# Altium PCB PCB1.PcbDoc
Units mil, origin at the board's own origin, x right, y up, seen from the top; angles counter-clockwise.
Board outline 2580 x 1855 mil, 2 copper layers (Top Layer, Bottom Layer); 49 components, 41 nets, 230 pads, 25 vias.
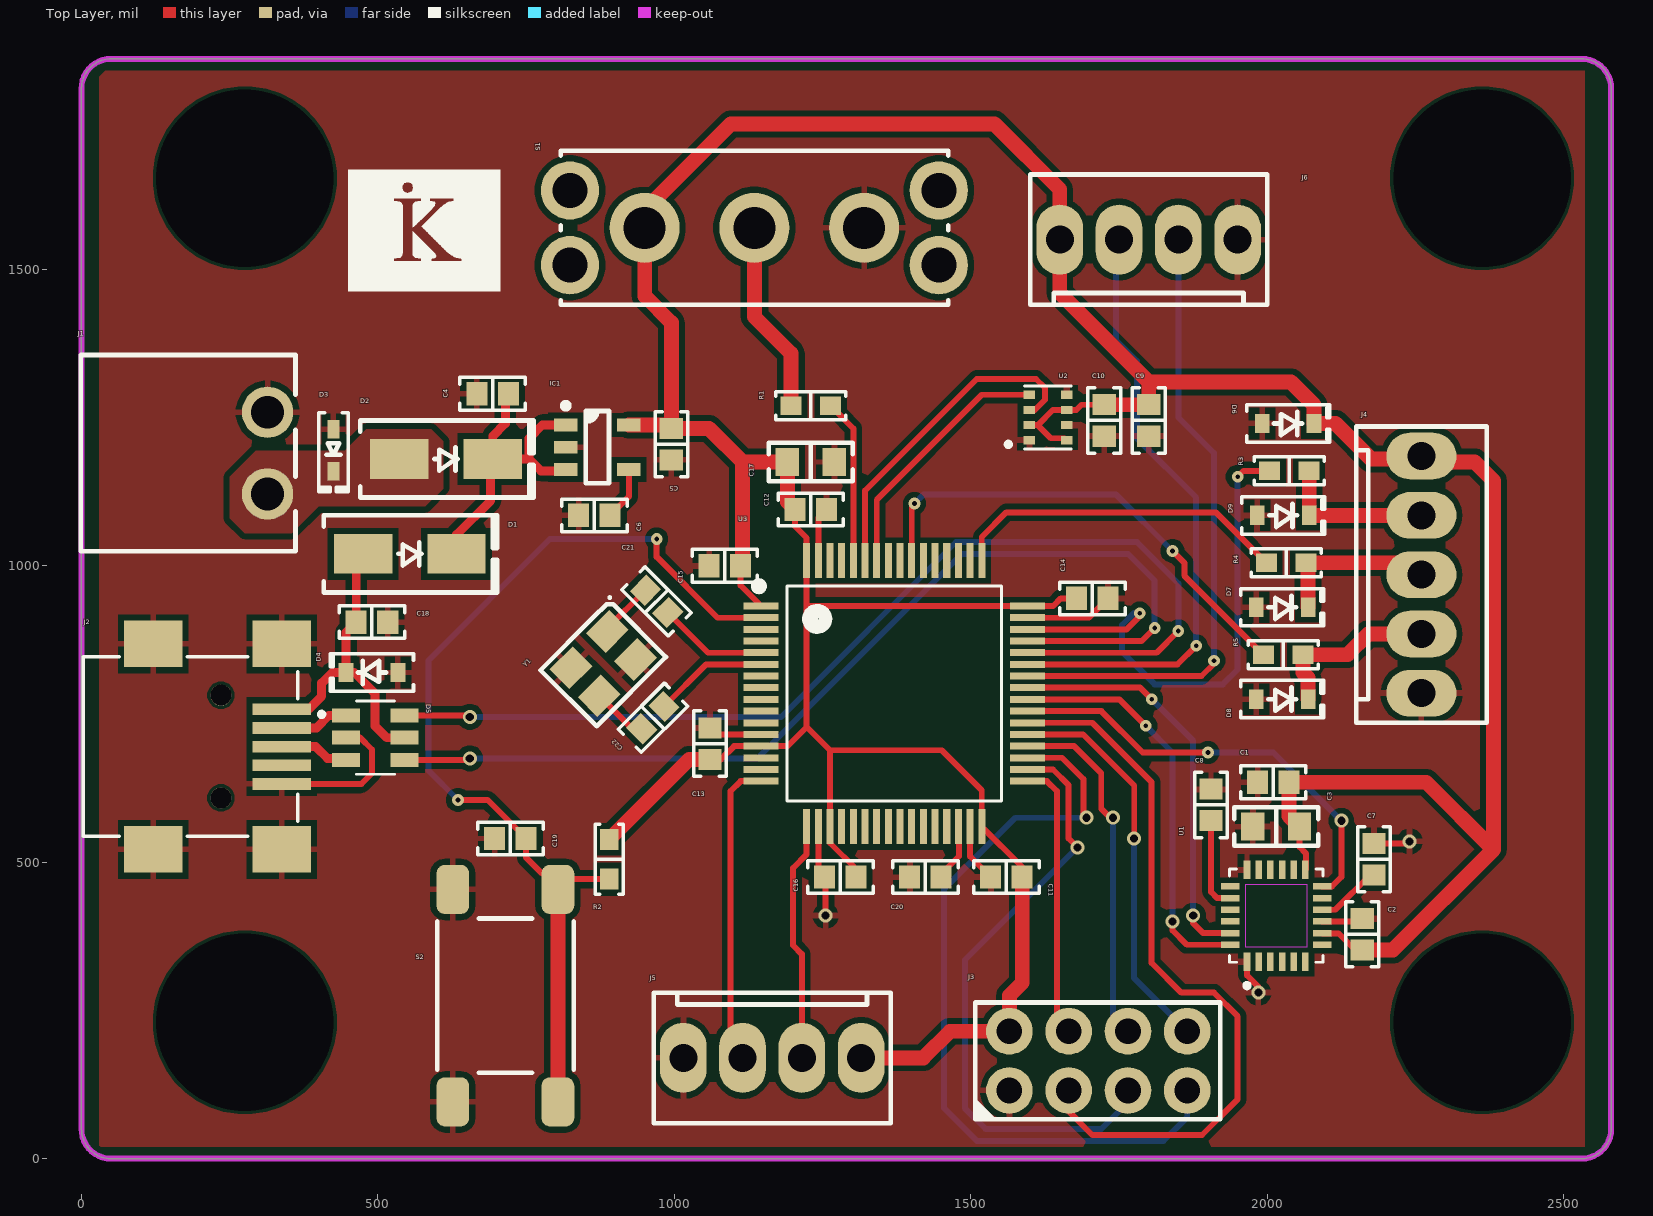
[diagram p0: Top Layer view]
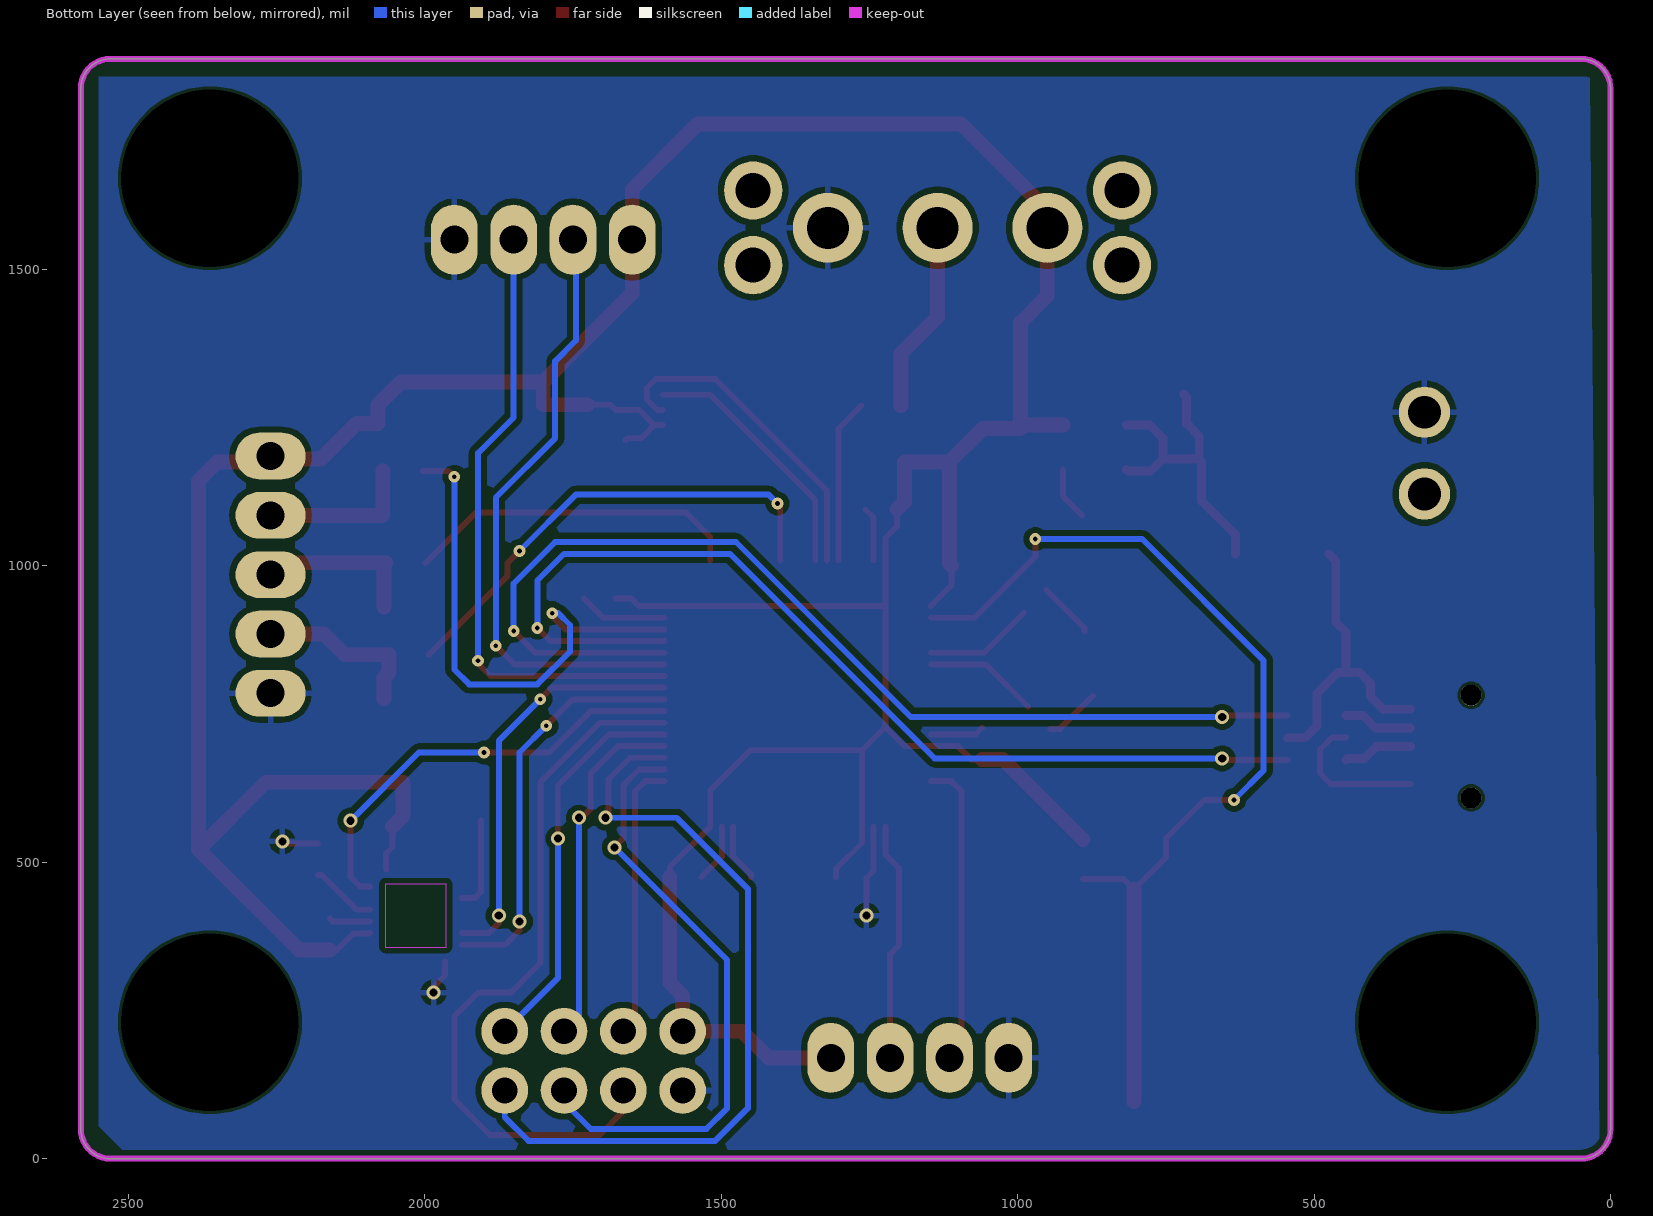
[diagram p1: Bottom Layer view, seen from below]
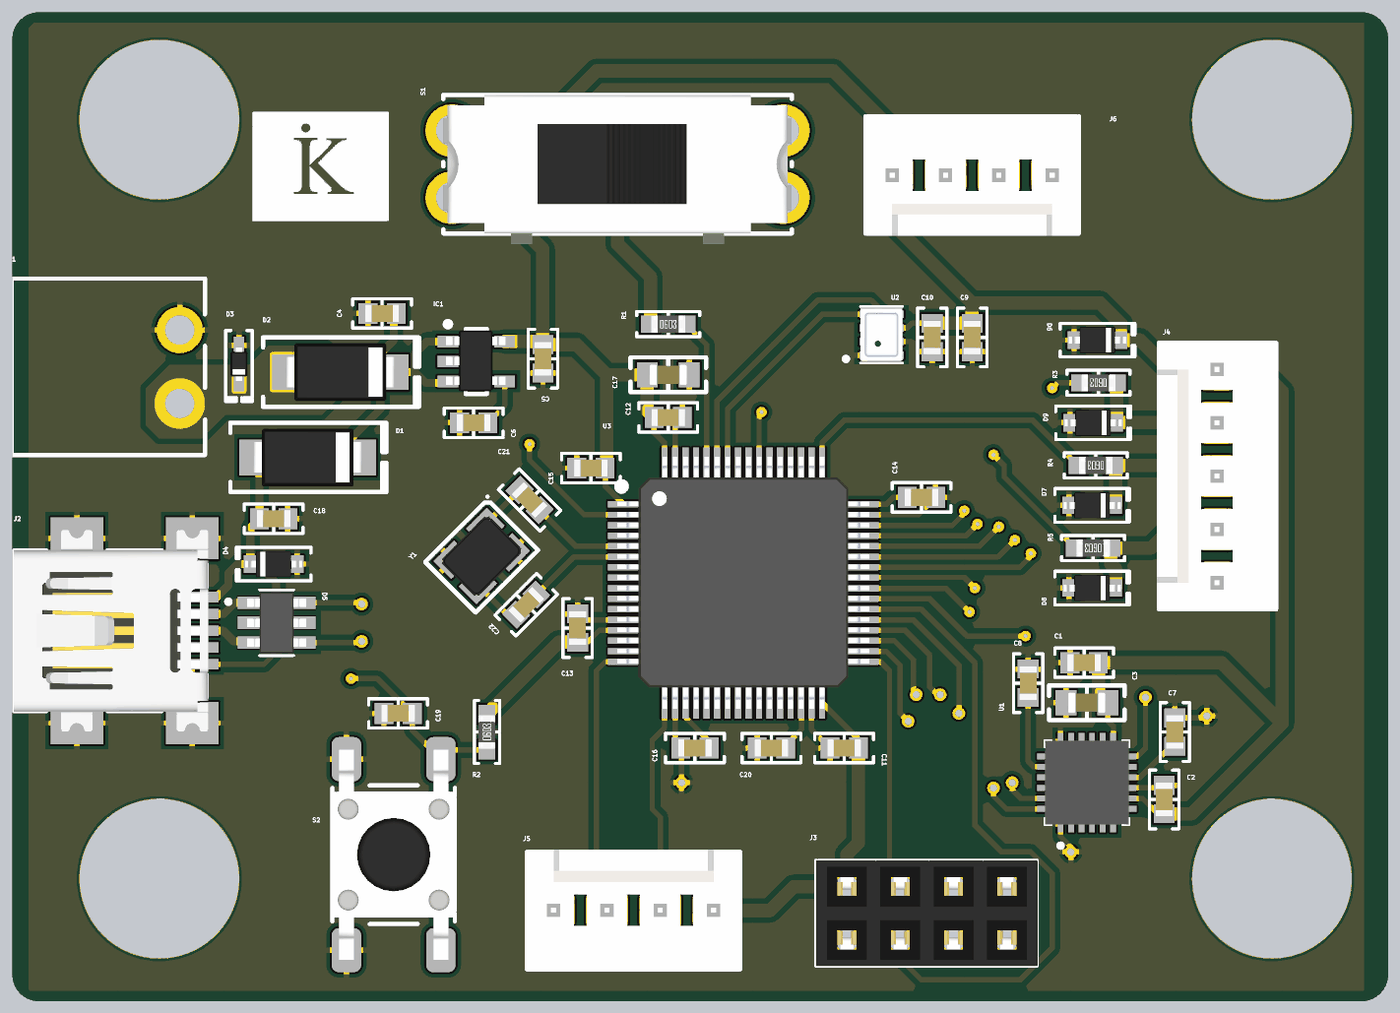
[diagram p2: 3D render of the assembled board from above, using the file's embedded part models]

## Layer stack, top to bottom
Top Solder: solder mask 0.4, Solder Resist, Dk 3.5
Top Layer: signal copper 1.4
Dielectric 1: dielectric 12.6, FR-4, Dk 4.8
Bottom Layer: signal copper 1.4
Bottom Solder: solder mask 0.4, Solder Resist, Dk 3.5

## Board outline
50,0 cw(c50,50) 0,50 0,1805 cw(c50,1805) 50,1855 2530,1855 cw(c2530,1805) 2580,1805 2580,50 cw(c2530,50) 2530,0

## Design rules (kind name [scope] priority, off if disabled: settings)
Clearance [All] p1: gap=10 ignorepadtopadclearanceinfootprint=FALSE except(0: Arc-Text Track-Text SMDPad-Text THPad-Text Via-Text Fill-Text Poly-Text Region-Text Text-Text Text-Hole; 2: Arc-SMDPad Track-SMDPad SMDPad-SMDPad; 5: Arc-Arc Arc-Track Arc-Via Arc-Hole Track-Track Track-Via Track-Hole SMDPad-Via SMDPad-Hole THPad-Via THPad-Hole Via-Hole Fill-Hole Poly-Hole Region-Hole)
HoleSize [All] p1: absolutevalues=TRUE maxlimit=500 minlimit=1 maxpercent=80.000 minpercent=20.000
MinimumSolderMaskSliver [All] p1: minsoldermaskwidth=0.1
PolygonConnect [All] p1: connectstyle=Relief reliefconductorwidth=10 reliefentries=4 polygonreliefangle="90 Angle" airgapwidth=10
RoutingVias [All] p1: holewidth=7.87 width=19.68 viastyle="Through Hole" minholewidth=7.87 minwidth=19.68 maxholewidth=28 maxwidth=50
SilkToSilkClearance [All] p1: silktosilkclearance=2
SilkToSolderMaskClearance [IsPad] p1: minsilkscreentomaskgap=1 clearancetoexposedcopper=TRUE
SolderMaskExpansion [All] p1: expansion=4 istentingtop=FALSE
SupplyNets "Schematic Supply Nets_3" [InNet('VCC_BAT')] p1: voltage=0.000
SupplyNets "Schematic Supply Nets_2" [InNet('GND')] p2: voltage=0.000
SupplyNets "Schematic Supply Nets_1" [InNet('VCC_USB')] p3: voltage=0.000
SupplyNets "Schematic Supply Nets" [InNet('+3V3')] p4: voltage=0.000
Width [All] p1: maxlimit=50 minlimit=10 preferedwidth=10 minimp=50.000000 maximp=50.000000 favimp=50.000000
26 further rules are at their usual default settings.

## Components (designator, comment, footprint, x,y, rotation, side; value= is the part's Value field where it differs from the comment)
C1 "0.1µF" "CAP 0603_1608" 2010,635 r0 top
C2 "0.1µF" "CAP 0603_1608" 2160,378.43 r270 top
C3 "10 µF" "MURATA GRM188 0603_1608" 2015,560 r0 top
C4 "1 µF" "CAP 0603_1608" 693.43,1290 r0 top
C5 "2.2 µF" "CAP 0603_1608" 995,1205 r90 top
C6 "10000 pF" "CAP 0603_1608" 865,1085 r0 top
C7 "0.1µF" "CAP 0603_1608" 2180,505 r270 top
C8 "2200 pF" "CAP 0603_1608" 1905,596.57 r270 top
C9 "0.1µF" "CAP 0603_1608" 1800,1245 r90 top
C10 "0.1µF" "CAP 0603_1608" 1725,1245 r90 top
C11 "0.1µF" "CAP 0603_1608" 1560,475 r0 top
C12 "0.1µF" "CAP 0603_1608" 1230,1095 r180 top
C13 "0.1µF" "CAP 0603_1608" 1060,700 r270 top
C14 "0.1µF" "CAP 0603_1608" 1705,945 r180 top
C15 "0.1µF" "CAP 0603_1608" 1085,1000 r0 top
C16 "0.1µF" "CAP 0603_1608" 1280,475 r0 top
C17 "10 µF" "MURATA GRM188 0603_1608" 1230,1175 r180 top
C18 "0.1µF" "CAP 0603_1608" 490,905 r0 top
C19 "0.1µF" "CAP 0603_1608" 723.43,540 r0 top
C20 "2.2 µF" "CAP 0603_1608" 1423.43,475 r180 top
C21 "20 pF" "CAP 0603_1608" 970,940 r315 top
C22 "20 pF" "CAP 0603_1608" 963.79,743.79 r45 top
D1 "MBRA210ET3G" "DO214AC SMA" 553.74,1020 r0 top
D2 "MBRA210ET3G" "DO214AC SMA" 615,1180 r0 top
D3 "ESD5V0D5B-TP" SOD523F 425,1195 r270 top
D4 "DESD5V0U1BA-7" SOD323 490,820 r180 top
D5 "USBLC6-2SC6" SOT23-6L 495.59,710 r0 top
D6 "DESD5V0U1BA-7" SOD323 2035,1240 r0 top
D7 "DESD5V0U1BA-7" SOD323 2025,930 r0 top
D8 "DESD5V0U1BA-7" SOD323 2025,775 r0 top
D9 "DESD5V0U1BA-7" SOD323 2026.81,1085 r0 top
IC1 "LP2985IM5X-3.3/NOPB" "TI SOT-23-5 DBV" 870,1200 r0 top
J1 "691322110002" "WURTH 691322110002" 180,1190 r90 top
J2 "Mini USB 2.0 Type B" 65100516121 185,695 r270 top
J3 "M20-7830442" "HARWIN M20-7830445" 1715,165 r90 top
J4 "0022272051" "MOLEX KK 0022272051" 2260,985 r270 top
J5 "0022272041" "MOLEX KK 0022272041" 1165,170 r180 top
J6 "0022272041" "MOLEX KK 0022272041" 1800,1550 r0 top
R1 "10 kOhms" "YAGEO RES 0603_1608" 1230,1270 r0 top
R2 "4.7 kOhms" "YAGEO RES 0603_1608" 890,505 r90 top
R3 "22 Ohms" "YAGEO RES 0603_1608" 2036.81,1160 r180 top
R4 "22 Ohms" "YAGEO RES 0603_1608" 2031.81,1005 r180 top
R5 "22 Ohms" "YAGEO RES 0603_1608" 2026.81,850 r180 top
S1 "MS12ASG13" "NKK MS12ASG13" 1134.96,1570 r180 top
S2 "1-1977223-9" "TE FSM6JSMA" 715,275 r0 top
U1 "MPU6050" MPU6050 2015,410 r90 top
U2 "BMP280" BMP280 1630,1250 r180 top
U3 "STM32F411RET6" LQFP-64 1370.98,785.2 r0 top
Y1 "16MHz" "ABRACON ABM8G" 880,835 r225 top

## Footprints (in the part's own frame and the unit in brackets; to place one, negate y for a bottom-side part, rotate by r counter-clockwise, add the part's x,y. Pads: shape width x height; smd on the part's side, far side on the other; paste and mask are expansions set on the pad)
65100516121 [mm] "Mini USB 2.0 Type B SMT Horizontal 5 Contacts"
  rect 0.5x2.5 smd: 1(-1.6,3.875) 2(-0.8,3.875) 3(0,3.875) 4(0.8,3.875) 5(1.6,3.875)
  round 0.9 hole 0.9 unplated: M1(-2.2,1.275) M2(2.2,1.275)
  rect 2x2.5 smd: S1(-4.4,3.875) S2(4.4,3.875) S3(-4.4,-1.625) S4(4.4,-1.625)
  silkscreen extent -3.85,-4.62 3.85,4.58, body extent -4.8,-4.63 4.8,4.62, height 3.92
"ABRACON ABM8G" [mm] "Crystal, 4-Leads, Body 2.50x3.20mm, Pitch 2.20mm, IPC Medium Density"
  rect 1.4x1.2 smd: 1(-1.1,-0.85) 2(1.1,-0.85) 3(1.1,0.85) 4(-1.1,0.85)
  silkscreen extent -2.25,-1.85 2.1,1.7, body extent -1.61,-1.26 1.61,1.26, height 0.6
BMP280 [mm]
  rect 0.5x0.35 smd: 1(0.8,0.975) 2(0.8,0.325) 3(0.8,-0.325) 4(0.8,-0.975) 5(-0.8,-0.975) 6(-0.8,-0.325) 7(-0.8,0.325) 8(-0.8,0.975)
  silkscreen extent -1,-1.35 1.79,1.35, body extent -1,-1.25 1,1.25, height 1
"CAP 0603_1608" [mm] "Chip Capacitor, 2-Leads, Body 1.60x0.80mm, IPC Medium Density"
  rect 0.9x1 smd: 1(-0.675,0) 2(0.675,0)
  silkscreen extent -1.4,-0.7 1.4,0.7, body extent -0.8,-0.41 0.8,0.41, height 0.82
"DO214AC SMA" [mm] "Molded Diode, 2-Leads, Body 4.30x2.60mm, IPC Medium Density"
  rect 2.5x1.7 smd: 1(-2,0) 2(2,0)
  silkscreen extent -3.68,-1.65 3.75,1.65, body extent -2.6,-1.37 2.6,1.37, height 2.4
"HARWIN M20-7830445" [mm] "2.54mm DIL PC TAIL PIN HEADER ASSEMBLY"
  round 2 hole 1.1: 1(-1.27,3.81) 2(-1.27,1.27) 3(-1.27,-1.27) 4(-1.27,-3.81) 5(1.27,-3.81) 6(1.27,-1.27) 7(1.27,1.27) 8(1.27,3.81)
  silkscreen extent -2.5,-5.23 2.5,5.27, body extent -2.52,-5.28 2.52,5.28, height 8.5
LQFP-64 [mm]
  rect 1.5x0.3 smd: 1(-5.705,3.73) 2(-5.705,3.23) 3(-5.705,2.73) 4(-5.705,2.23) 5(-5.705,1.73) 6(-5.705,1.23) 7(-5.705,0.73) 8(-5.705,0.23) 9(-5.705,-0.27) 10(-5.705,-0.77) 11(-5.705,-1.27) 12(-5.705,-1.77) 13(-5.705,-2.27) 14(-5.705,-2.77) 15(-5.705,-3.27) 16(-5.705,-3.77) 33(5.695,-3.77) 34(5.695,-3.27) 35(5.695,-2.77) 36(5.695,-2.27) 37(5.695,-1.77) 38(5.695,-1.27) 39(5.695,-0.77) 40(5.695,-0.27) 41(5.695,0.23) 42(5.695,0.73) 43(5.695,1.23) 44(5.695,1.73) 45(5.695,2.23) 46(5.695,2.73) 47(5.695,3.23) 48(5.695,3.73)
  rect 0.3x1.5 smd: 17(-3.755,-5.72) 18(-3.255,-5.72) 19(-2.755,-5.72) 20(-2.255,-5.72) 21(-1.755,-5.72) 22(-1.255,-5.72) 23(-0.755,-5.72) 24(-0.255,-5.72) 25(0.245,-5.72) 26(0.745,-5.72) 27(1.245,-5.72) 28(1.745,-5.72) 29(2.245,-5.72) 30(2.745,-5.72) 31(3.245,-5.72) 32(3.745,-5.72) 49(3.745,5.68) 50(3.245,5.68) 51(2.745,5.68) 52(2.245,5.68) 53(1.745,5.68) 54(1.245,5.68) 55(0.745,5.68) 56(0.245,5.68) 57(-0.255,5.68) 58(-0.755,5.68) 59(-1.255,5.68) 60(-1.755,5.68) 61(-2.255,5.68) 62(-2.755,5.68) 63(-3.255,5.68) 64(-3.755,5.68)
  silkscreen extent -6.09,-4.62 4.59,4.86, body extent -6,-6 6,6, height 1.6
"MOLEX KK 0022272041" [mm]
  oval 2x3 hole 1.2: 1(-3.81,0) 2(-1.27,0) 3(1.27,0) 4(3.81,0)
  silkscreen extent -5.08,-2.79 5.08,2.79, body extent -5.08,-2.9 5.08,2.9, height 11.7
"MOLEX KK 0022272051" [mm]
  oval 2x3 hole 1.2: 1(-5.08,0) 2(-2.54,0) 3(0,0) 4(2.54,0) 5(5.08,0)
  silkscreen extent -6.35,-2.79 6.35,2.79, body extent -6.35,-2.9 6.35,2.9, height 11.7
MPU6050 [mm]
  rect 0.79x0.28 smd: 1(-1.97,1.25) 2(-1.97,0.75) 3(-1.97,0.25) 4(-1.97,-0.25) 5(-1.97,-0.75) 6(-1.97,-1.25) 13(1.97,-1.25) 14(1.97,-0.75) 15(1.97,-0.25) 16(1.97,0.25) 17(1.97,0.75) 18(1.97,1.25)
  rect 0.28x0.79 smd: 7(-1.25,-1.97) 8(-0.75,-1.97) 9(-0.25,-1.97) 10(0.25,-1.97) 11(0.75,-1.97) 12(1.25,-1.97) 19(1.25,1.97) 20(0.75,1.97) 21(0.25,1.97) 22(-0.25,1.97) 23(-0.75,1.97) 24(-1.25,1.97)
  Keep-Out Layer region: 1.35,-1.3 -1.35,-1.3 -1.35,1.3 1.35,1.3
  silkscreen extent -3.1,-2 2,2, body extent -2,-2 2,2, height 0.93
"MURATA GRM188 0603_1608" [mm] "Chip Capacitor, 2-Leads, Body 1.60x0.80mm"
  rect 1x1.2 smd: 1(-1,0) 2(1,0)
  silkscreen extent -1.8,-0.83 1.8,0.83, body extent -0.9,-0.5 0.9,0.5, height 1
"NKK MS12ASG13" [mm]
  round 3 hole 1.8: 1(-4.7,0) 2(0,0) 3(4.7,0)
  round 2.5 hole 1.5: M(-7.9,-1.6) M(-7.9,1.6) M(7.9,-1.6) M(7.9,1.6)
  silkscreen extent -8.3,-3.3 8.3,3.3, body extent -8.31,-3.3 8.31,3.81, height 13.41
SOD323 [mm] "SOD, 2-Leads, Body 1.25x2.50mm, IPC Medium Density"
  rect 0.625x0.83 smd: 1(-1.112,0) 2(1.112,0)
  silkscreen extent -1.78,-0.8 1.78,0.8, body extent -1.36,-0.62 1.36,0.62, height 1.05
SOD523F [mm] "SODFL, 2-Leads, Body 0.80x1.60mm, IPC Medium Density"
  rect 0.8x0.5 smd: 1(-0.9,0) 2(0.9,0)
  silkscreen extent -1.6,-0.64 1.8,0.64, body extent -0.8,-0.4 0.8,0.4, height 0.65
SOT23-6L [mm]
  rect 1.2x0.6 smd mask+0.05: 1(-1.255,0.95) 2(-1.255,0) 3(-1.255,-0.95) 4(1.255,-0.95) 5(1.255,0) 6(1.255,0.95)
  silkscreen extent -2.4,-1.57 0.81,1.57, body extent -1.4,-1.46 1.4,1.46, height 1.42
"TE FSM6JSMA" [mm]
  rrect50% 1.4x2.1 smd: 1(2.25,4.55) 2(2.25,-4.55) 3(-2.25,4.55) 4(-2.25,-4.55)
  silkscreen extent -2.92,-3.3 2.92,3.3, body extent -3,-5 3,5, height 7.11
"TI SOT-23-5 DBV" [mm] "SOT23, 5-Leads, Body 2.90x2.80mm, Pitch 0.95mm, IPC Medium Density"
  rect 1x0.55 smd: 1(-1.35,0.95) 2(-1.35,0) 3(-1.35,-0.95) 4(1.35,-0.95) 5(1.35,0.95)
  silkscreen extent -1.47,-1.55 0.5,1.9, body extent -1.44,-1.43 1.39,1.48, height 1.5
"WURTH 691322110002" [mm] "2 Position Terminal Block Header, Male Pins, 3.5mm Pitch,8.4x9.2mm Body, 90°, Right Angle, THT"
  round 2.2 hole 1.4: 1(-1.75,-3.4) 2(1.75,-3.4)
  silkscreen extent -4.2,-4.6 4.2,4.6, body extent -4.2,-4.6 4.2,4.6, height 7.2
"YAGEO RES 0603_1608" [mm] "Chip Resistor, 2-Leads, Body 1.60x0.80mm"
  rect 0.9x0.8 smd: 1(-0.85,0) 2(0.85,0)
  silkscreen extent -1.5,-0.6 1.5,0.6, body extent -0.8,-0.4 0.8,0.4, height 0.45

## Part data
C1 C2 C7 C9 C10 C11 C12 C13 C14 C15 C16 C18 C19: library part LD03ZC104KAB2A, "CAP CER 0.1UF 10V X7R 0603", Device Package="0603 (1608 Metric)", manufacturer="AVX Corporation", Operating Temperature="-55°C ~ 125°C", Supplier Part Number 1=478-12926-1-ND, Temperature Coefficient=X7R, Tolerance=±10%, Voltage - Rated=10V, Applications="General Purpose", Capacitance=0.1µF, componentlink1description=Datasheet, componentlink1url=http://datasheets.avx.com/LD-Series.pdf, componentlink2description="DigiKey Link", componentlink2url=http://digikey.com/product-detail/en/avx-corporation/LD03ZC104KAB2A/478-12926-1-ND/9949296, lastupdated="2.09.2020 01:03:06", Lifecycle Status=Active, Minimum Order=1, Mounting Type="Surface Mount, MLCC", Package / Case="0603 (1608 Metric)", packaging=TapeAndReel, Part Number=LD03ZC104KAB2A, Part Status=Active, partid=16481, price=0.17, series=LD, Size / Dimension="0.063\" L x 0.032\" W (1.60mm x 0.81mm)", Supplier 1=DigiKey, Thickness (Max)="0.035\" (0.90mm)"
C3 C17: library part GRM188C81A106MA73D, "CAP CER 10UF 10V X6S 0603", Device Package="0603 (1608 Metric)", manufacturer="Murata Electronics", Operating Temperature="-55°C ~ 105°C", Supplier Part Number 1=490-7197-1-ND, Temperature Coefficient=X6S, Tolerance=±20%, Voltage - Rated=10V, Applications="General Purpose", Capacitance="10 µF", componentlink1description=Datasheet, componentlink1url=https://www.murata.com/~/media/webrenewal/support/library/catalog/products/capacitor/mlcc/c02e.ashx?la=en-us, componentlink2description="DigiKey Link", componentlink2url=https://www.digikey.com/en/products/detail/murata-electronics/GRM188C81A106MA73D/3900461, lastupdated="20.07.2024 00:23:22", Lifecycle Status=Active, Minimum Order=1, Mounting Type="Surface Mount, MLCC", Package / Case="0603 (1608 Metric)", packaging=TapeAndReel, Part Number=GRM188C81A106MA73D, Part Status=Active, partid=2456, price=0.04, series=GRM, Size / Dimension="0.063\" L x 0.031\" W (1.60mm x 0.80mm)", Supplier 1=DigiKey, Thickness (Max)="0.039\" (1.00mm)"
C4: library part CL10B105KA8NNNC, "CAP CER 1UF 25V X7R 0603", Device Package="0603 (1608 Metric)", manufacturer="Samsung Electro-Mechanics", Operating Temperature="-55°C ~ 125°C", Supplier Part Number 1=1276-1184-1-ND, Temperature Coefficient=X7R, Tolerance=±10%, Voltage - Rated=25V, Applications="General Purpose", Capacitance="1 µF", componentlink1description=Datasheet, componentlink1url=http://www.samsungsem.com/kr/support/product-search/mlcc/CL10B105KA8NNNC.jsp, componentlink2description="DigiKey Link", componentlink2url=https://www.digikey.com/en/products/detail/samsung-electro-mechanics/CL10B105KA8NNNC/3886842, lastupdated="9.02.2024 20:10:26", Lifecycle Status=Active, Minimum Order=1, Mounting Type="Surface Mount, MLCC", Package / Case="0603 (1608 Metric)", packaging=TapeAndReel, Part Number=CL10B105KA8NNNC, Part Status=Active, partid=5552, price=0.01, series=CL, Size / Dimension="0.063\" L x 0.031\" W (1.60mm x 0.80mm)", Supplier 1=DigiKey, Thickness (Max)="0.035\" (0.90mm)"
C5: library part CL10A225KO8NNNC, "CAP CER 2.2UF 16V X5R 0603", Device Package="0603 (1608 Metric)", manufacturer="Samsung Electro-Mechanics", Operating Temperature="-55°C ~ 85°C", Supplier Part Number 1=1276-1040-1-ND, Temperature Coefficient=X5R, Tolerance=±10%, Voltage - Rated=16V, Applications="General Purpose", Capacitance="2.2 µF", componentlink1description=Datasheet, componentlink1url=http://www.samsungsem.com/kr/support/product-search/mlcc/CL10A225KO8NNNC.jsp, componentlink2description="DigiKey Link", componentlink2url=https://www.digikey.com/en/products/detail/samsung-electro-mechanics/CL10A225KO8NNNC/3886698, lastupdated="9.02.2024 20:10:26", Lifecycle Status=Active, Minimum Order=1, Mounting Type="Surface Mount, MLCC", Package / Case="0603 (1608 Metric)", packaging=TapeAndReel, Part Number=CL10A225KO8NNNC, Part Status=Active, partid=5651, price=0.01, series=CL, Size / Dimension="0.063\" L x 0.031\" W (1.60mm x 0.80mm)", Supplier 1=DigiKey, Thickness (Max)="0.035\" (0.90mm)"
C6: library part CC0603MRX7R8BB103, "CAP CER 10000PF 25V X7R 0603", Device Package="0603 (1608 Metric)", manufacturer=Yageo, Operating Temperature="-55°C ~ 125°C", Supplier Part Number 1=311-4108-1-ND, Temperature Coefficient=X7R, Tolerance=±20%, Voltage - Rated=25V, Applications="General Purpose", Capacitance="10000 pF", componentlink1description=Datasheet, componentlink1url=https://www.yageo.com/upload/media/product/productsearch/datasheet/mlcc/UPY-GPHC_X7R_6.3V-to-50V_18.pdf, componentlink2description="DigiKey Link", componentlink2url=https://www.digikey.com/en/products/detail/yageo/CC0603MRX7R8BB103/5883820, lastupdated="9.02.2024 20:10:23", Lifecycle Status=Active, Minimum Order=1, Mounting Type="Surface Mount, MLCC", Package / Case="0603 (1608 Metric)", packaging=TapeAndReel, Part Number=CC0603MRX7R8BB103, Part Status=Active, partid=7806, price=0.01, series=CC, Size / Dimension="0.063\" L x 0.031\" W (1.60mm x 0.80mm)", Supplier 1=DigiKey, Thickness (Max)="0.035\" (0.90mm)"
C8: library part 885012006015, "CAP CER 2200PF 10V C0G/NP0 0603", Device Package="0603 (1608 Metric)", manufacturer="Würth Elektronik", Operating Temperature="-55°C ~ 125°C", Supplier Part Number 1=732-12250-1-ND, Temperature Coefficient="C0G, NP0", Tolerance=±5%, Voltage - Rated=10V, Applications="General Purpose", Capacitance="2200 pF", componentlink1description=Datasheet, componentlink1url=https://katalog.we-online.de/pbs/datasheet/885012006015.pdf, componentlink2description="DigiKey Link", componentlink2url=https://www.digikey.com/en/products/detail/würth-elektronik/885012006015/5455584, lastupdated="9.02.2024 20:10:22", Lifecycle Status=Active, Minimum Order=1, Mounting Type="Surface Mount, MLCC", Package / Case="0603 (1608 Metric)", packaging=TapeAndReel, Part Number=885012006015, Part Status=Active, partid=8918, price=0.06, series=WCAP-CSGP, Size / Dimension="0.063\" L x 0.031\" W (1.60mm x 0.80mm)", Supplier 1=DigiKey, Thickness (Max)="0.034\" (0.87mm)"
C20: library part LMK107BJ225KAHT, "CAP CER 2.2UF 10V X5R 0603", Device Package="0603 (1608 Metric)", manufacturer="Taiyo Yuden", Operating Temperature="-55°C ~ 85°C", Ratings=AEC-Q200, Supplier Part Number 1=587-3414-1-ND, Temperature Coefficient=X5R, Tolerance=±10%, Voltage - Rated=10V, Applications=Automotive, Capacitance="2.2 µF", componentlink1description=Datasheet, componentlink1url="https://ds.yuden.co.jp/TYCOMPAS/ut/detail?pn=LMK107BJ225KAHT  &u=M", componentlink2description="DigiKey Link", componentlink2url=https://www.digikey.com/en/products/detail/taiyo-yuden/LMK107BJ225KAHT/4157763, lastupdated="9.02.2024 20:10:23", Lifecycle Status=Active, Minimum Order=1, Mounting Type="Surface Mount, MLCC", Package / Case="0603 (1608 Metric)", packaging=TapeAndReel, Part Number=LMK107BJ225KAHT, Part Status=Active, partid=39173, price=0.01, series=M, Size / Dimension="0.063\" L x 0.031\" W (1.60mm x 0.80mm)", Supplier 1=DigiKey, Thickness (Max)="0.035\" (0.90mm)"
C21 C22: library part C0603C200G8HAC7867, "CAP CER 20PF 10V X8R 0603", Device Package="0603 (1608 Metric)", manufacturer=KEMET, Operating Temperature="-55°C ~ 150°C", Supplier Part Number 1=399-C0603C200G8HAC7867CT-ND, Temperature Coefficient=X8R, Tolerance=±2%, Voltage - Rated=10V, Applications="General Purpose", Capacitance="20 pF", componentlink1description=Datasheet, componentlink1url=https://api.kemet.com/component-edge/download/datasheet/C0603C200G8HAC7867.pdf, componentlink2description="DigiKey Link", componentlink2url=https://www.digikey.com/en/products/detail/kemet/C0603C200G8HAC7867/7946222, Features="Low ESL, High Temperature", lastupdated="9.02.2024 20:09:59", Lifecycle Status=Active, Minimum Order=1, Mounting Type="Surface Mount, MLCC", Package / Case="0603 (1608 Metric)", packaging=TapeAndReel, Part Number=C0603C200G8HAC7867, Part Status=Active, partid=35714, price=0.01, series="SMD Comm X8R HT150C", Size / Dimension="0.063\" L x 0.031\" W (1.60mm x 0.80mm)", Supplier 1=DigiKey, Thickness (Max)="0.034\" (0.87mm)"
D1 D2: "DIODE SCHOTTKY 10V 2A SMA", Current - Average Rectified (Io)=2A, Current - Reverse Leakage @ Vr="50µA @ 10V", manufacturer="ON Semiconductor", Operating Temperature - Junction="-65°C ~ 150°C", Package / Case="DO-214AC, SMA", Supplier Device Package=SMA, Supplier Part Number 1=MBRA210ET3GOSCT-ND, Voltage - DC Reverse (Vr) (Max)=10V, Voltage - Forward (Vf) (Max) @ If="500mV @ 2A", componentlink1description=Datasheet, componentlink1url=http://www.onsemi.com/pub/Collateral/MBRA210ET3-D.PDF, componentlink2description="DigiKey Link", componentlink2url=http://digikey.com/product-detail/en/on-semiconductor/MBRA210ET3G/MBRA210ET3GOSCT-ND/2705027, Diode Type=Schottky, lastupdated="3.06.2024 19:54:30", Lifecycle Status=Active, Minimum Order=1, Mounting Type="Surface Mount", packaging=TapeAndReel, Part Number=MBRA210ET3G, Part Status=Active, partid=2119, price=0.19, series=-, Speed="Fast Recovery =< 500ns, > 200mA (Io)", Supplier 1=DigiKey
D3: "TVS DIODE 5VWM 13VC SOD523", Capacitance @ Frequency="27pF @ 1MHz", Current - Peak Pulse (10/1000µs)=12A, manufacturer="Micro Commercial Co", Operating Temperature="-55°C ~ 150°C (TJ)", Package / Case="SC-79, SOD-523", Power - Peak Pulse=150W, Power Line Protection=No, Supplier Device Package=SOD-523, Supplier Part Number 1=ESD5V0D5B-TPMSCT-ND, Voltage - Breakdown (Min)=5.8V, Voltage - Clamping (Max) @ Ipp=13V, Voltage - Reverse Standoff (Typ)="5V (Max)", Applications="General Purpose", Bidirectional Channels=1, componentlink1description=Datasheet, componentlink1url=https://www.mccsemi.com/pdf/Products/ESD5V0D5B(SOD-523).pdf, componentlink2description="DigiKey Link", componentlink2url=https://www.digikey.com/en/products/detail/micro-commercial-co/ESD5V0D5B-TP/2213550, lastupdated="3.06.2024 20:22:21", Lifecycle Status=Active, Minimum Order=1, Mounting Type="Surface Mount", packaging=TapeAndReel, Part Number=ESD5V0D5B-TP, Part Status=Active, partid=9819, price=0.07, series=-, Supplier 1=DigiKey, Type=Zener
D4 D6 D7 D8 D9: "TVS DIODE 5VWM 7.2VC SOD323", Capacitance @ Frequency="2.9pF @ 1MHz", Current - Peak Pulse (10/1000µs)="3A (8/20µs)", manufacturer="Diodes Incorporated", Operating Temperature="-65°C ~ 150°C (TJ)", Package / Case="SC-76, SOD-323", Power Line Protection=No, Supplier Device Package=SOD-323, Supplier Part Number 1=DESD5V0U1BA-7DICT-ND, Voltage - Breakdown (Min)=5.5V, Voltage - Clamping (Max) @ Ipp="7.2V (Typ)", Voltage - Reverse Standoff (Typ)="5V (Max)", Applications="General Purpose", Bidirectional Channels=1, componentlink1description=Datasheet, componentlink1url=https://www.diodes.com/assets/Datasheets/DESD5V0U1BA.pdf, componentlink2description="DigiKey Link", componentlink2url=https://www.digikey.com/en/products/detail/diodes-incorporated/DESD5V0U1BA-7/5371876, lastupdated="3.06.2024 20:22:28", Lifecycle Status=Active, Minimum Order=1, Mounting Type="Surface Mount", packaging=TapeAndReel, Part Number=DESD5V0U1BA-7, Part Status=Active, partid=9987, price=0.02, series=-, Supplier 1=DigiKey, Type=Zener
D5: "15V Clamp 6A (8/20µs) Ipp Tvs Diode Surface Mount SOT-23-6", Current - Peak Pulse (10/1000µs)="5A (8/20µs)", Operating Temperature="-40°C ~ 150°C (TJ)", Package / Case=SOT23-6, Voltage - Breakdown (Min)=6V, Voltage - Clamping (Max) @ Ipp=17V, Voltage - Reverse Standoff (Typ)=5.25V, componentlink1description=Datasheet, componentlink1url=https://mm.digikey.com/Volume0/opasdata/d220001/medias/docus/5338/USBLC6-2SC6.pdf, componentlink2description="Digikey Link", componentlink2url=https://www.digikey.com/en/products/detail/umw/usblc6-2sc6/16705896, Designed by=İK
IC1: "IC REG LINEAR 3.3V 150MA SOT23-5", Current - Output=150mA, Current - Quiescent (Iq)="95 µA", Current - Supply (Max)="2.5 mA", manufacturer="Texas Instruments", Operating Temperature="-40°C ~ 125°C", Package / Case="SC-74A, SOT-753", Supplier Device Package=SOT-23-5, Supplier Part Number 1=LP2985IM5X-3.3/NOPBCT-ND, Voltage - Output (Min/Fixed)=3.3V, Voltage - Input (Max)=16V, Voltage Dropout (Max)="0.58V @ 150mA", componentlink1description=Datasheet, componentlink1url=http://www.ti.com/general/docs/suppproductinfo.tsp?distId=10&gotoUrl=http%3A%2F%2Fwww.ti.com%2Flit%2Fgpn%2Flp2985-n, componentlink2description="DigiKey Link", componentlink2url=https://www.digikey.com/en/products/detail/texas-instruments/LP2985IM5X-3-3-NOPB/367679, Control Features=Enable, lastupdated="21.06.2022 13:01:53", Lifecycle Status=Active, Minimum Order=1, Mounting Type="Surface Mount", Number of Regulators=1, Output Configuration=Positive, Output Type=Fixed, packaging=TapeAndReel, Part Number=LP2985IM5X-3.3/NOPB, Part Status=Active, price=0.45, Protection Features="Over Current, Over Temperature, Short Circuit", PSRR="45dB (1kHz)", series=-, Supplier 1=DigiKey
J1: "TERM BLOCK HDR 2POS 90DEG 3.5MM", Color=Green, Current - UL="10 A", manufacturer="Würth Elektronik", Operating Temperature="-40°C ~ 105°C", Supplier Part Number 1=732-2769-ND, Voltage - UL="300 V", componentlink1description=Datasheet, componentlink1url=https://katalog.we-online.de/em/datasheet/6913221100xx.pdf, componentlink2description="DigiKey Link", componentlink2url=https://www.digikey.com/en/products/detail/würth-elektronik/691322110002/2508538, Contact Mating Finish=Tin, Header Orientation="90°, Right Angle", lastupdated="21.06.2022 14:48:48", Lifecycle Status=Active, Minimum Order=1, Mounting Type="Through Hole", Number of Levels=1, Number of Positions=2, packaging=Bulk, Part Number=691322110002, Part Status=Active, Pitch="0.138\" (3.50mm)", Positions Per Level=2, price=0.26, series="WR-TBL Series 3221", Supplier 1=DigiKey, Termination Style=Solder, Type="Header, Male Pins, Shrouded (4 Side)"
J2: library part 65100516121, "Mini USB 2.0 Type B Horizontal SMT 5 Contacts WR-COM", Operating Temperature="-40 to 105 degC", Rated Current="1 A", componentlink1description=Manufacturer, componentlink1url=http://www.we-online.de, componentlink2description=Datasheet, componentlink2url=http://katalog.we-online.de/em/datasheet/65100516121.pdf, Gender=Female, Mounting Technology=SMT, Orientation=Horizontal, packaging=Tray, Part Number=65100516121, Published Date="May 2018", Publisher="Wurth Elektronik", Interface Type="Mini USB 2.0 Type B"
J3: "CONN RCPT 8POS 0.1 GOLD PCB", Current Rating (Amps)=3A, manufacturer="Harwin Inc.", Material Flammability Rating="UL94 V-0", Operating Temperature="-40°C ~ 105°C", Supplier Part Number 1=952-1789-ND, Insulation Color=Black, componentlink1description=Datasheet, componentlink1url=https://cdn.harwin.com/pdfs/C001XX_M20_Series_Connectors.pdf, componentlink2description="DigiKey Link", componentlink2url=http://digikey.com/product-detail/en/harwin-inc/M20-7830442/952-1789-ND/3727758, Connector Type=Receptacle, Contact Finish - Mating=Gold, Contact Finish - Post=Tin, Contact Finish Thickness - Mating=Flash, Contact Length - Post="0.118\" (3.00mm)", Contact Type="Female Socket", Fastening Type=Push-Pull, lastupdated="21.09.2022 19:04:26", Lifecycle Status=Active, Mated Stacking Heights="11.04mm, 12.63mm", Minimum Order=1, Mounting Type="Through Hole", Number of Positions=8, Number of Positions Loaded=All, Number of Rows=2, packaging=Tube, Part Number=M20-7830442, Part Status=Active, Pitch - Mating="0.100\" (2.54mm)", price=1.36, Row Spacing - Mating="0.100\" (2.54mm)", series=M20, Style="Board to Board or Cable", Supplier 1=DigiKey, Termination=Solder, Insulation Height="0.335\" (8.51mm)"
J4: "CONN HEADER VERT 5POS 2.54MM", manufacturer=Molex, Material Flammability Rating="UL94 V-0", Supplier Part Number 1=WM4114-ND, Insulation Color=Natural, componentlink1description=Datasheet, componentlink1url=https://www.molex.com/pdm_docs/sd/022272051_sd.pdf, componentlink2description="DigiKey Link", componentlink2url=http://digikey.com/product-detail/en/molex/0022272051/WM4114-ND/1130580, Connector Type=Header, Contact Finish - Mating=Tin, Contact Finish - Post=Tin, Contact Finish Thickness - Mating="100.0µin (2.54µm)", Contact Length - Mating="0.295\" (7.49mm)", Contact Length - Post="0.140\" (3.56mm)", Contact Material=Brass, Contact Shape=Square, Contact Type="Male Pin", Fastening Type="Friction Lock", lastupdated="12.01.2020 23:52:16", Lifecycle Status=Active, Minimum Order=1, Mounting Type="Through Hole", Number of Positions=5, Number of Positions Loaded=All, Number of Rows=1, Overall Contact Length="0.560\" (14.22mm)", packaging=Bulk, Part Number=0022272051, Part Status=Active, partid=79, Pitch - Mating="0.100\" (2.54mm)", price=0.46, series="KK 6410", Shrouding="Shrouded - 1 Wall", Style="Board to Cable/Wire", Supplier 1=DigiKey, Termination=Solder, Insulation Height="0.461\" (11.70mm)", Insulation Material="Polyamide (PA), Nylon"
J5 J6: "CONN HEADER VERT 4POS 2.54MM", manufacturer=Molex, Material Flammability Rating="UL94 V-0", Supplier Part Number 1=WM4113-ND, Insulation Color=Natural, componentlink1description=Datasheet, componentlink1url=https://www.molex.com/pdm_docs/sd/022272041_sd.pdf, componentlink2description="DigiKey Link", componentlink2url=http://digikey.com/product-detail/en/molex/0022272041/WM4113-ND/1130579, Connector Type=Header, Contact Finish - Mating=Tin, Contact Finish - Post=Tin, Contact Finish Thickness - Mating="100.0µin (2.54µm)", Contact Length - Mating="0.295\" (7.49mm)", Contact Length - Post="0.140\" (3.56mm)", Contact Material=Brass, Contact Shape=Square, Contact Type="Male Pin", Fastening Type="Friction Lock", lastupdated="12.01.2020 23:52:05", Lifecycle Status=Active, Minimum Order=1, Mounting Type="Through Hole", Number of Positions=4, Number of Positions Loaded=All, Number of Rows=1, Overall Contact Length="0.560\" (14.22mm)", packaging=Bulk, Part Number=0022272041, Part Status=Active, partid=78, Pitch - Mating="0.100\" (2.54mm)", price=0.40, series="KK 6410", Shrouding="Shrouded - 1 Wall", Style="Board to Cable/Wire", Supplier 1=DigiKey, Termination=Solder, Insulation Height="0.461\" (11.70mm)", Insulation Material="Polyamide (PA), Nylon"
R1: library part AC0603FR-1310KL, "RES 10K OHM 1% 1/10W 0603", Device Package="0603 (1608 Metric)", manufacturer=Yageo, Operating Temperature="-55°C ~ 155°C", Power (Watts)="0.1W, 1/10W", Ratings=AEC-Q200, Supplier Device Package=0603, Supplier Part Number 1=13-AC0603FR-1310KLCT-ND, Temperature Coefficient=±100ppm/°C, Tolerance=±1%, componentlink1description=Datasheet, componentlink1url=https://www.yageo.com/upload/media/product/productsearch/datasheet/rchip/PYu-AC_51_RoHS_L_8.pdf, componentlink2description="DigiKey Link", componentlink2url=https://www.digikey.com/en/products/detail/yageo/AC0603FR-1310KL/13694194, Composition="Thick Film", Features="Automotive AEC-Q200, Moisture Resistant", Height - Seated (Max)="0.022\" (0.55mm)", lastupdated="25.07.2024 09:19:08", Lifecycle Status=Active, Minimum Order=1, Number of Terminations=2, Package / Case="0603 (1608 Metric)", packaging=CutTape, Part Number=AC0603FR-1310KL, Part Status=Active, partid=67630, price=0.01, Resistance="10 kOhms", series=AC, Size / Dimension="0.063\" L x 0.031\" W (1.60mm x 0.80mm)", Supplier 1=DigiKey
R2: library part AC0603FR-134K7L, "RES 4.7K OHM 1% 1/10W 0603", Device Package="0603 (1608 Metric)", manufacturer=Yageo, Operating Temperature="-55°C ~ 155°C", Power (Watts)="0.1W, 1/10W", Ratings=AEC-Q200, Supplier Device Package=0603, Supplier Part Number 1=13-AC0603FR-134K7LCT-ND, Temperature Coefficient=±100ppm/°C, Tolerance=±1%, componentlink1description=Datasheet, componentlink1url=https://www.yageo.com/upload/media/product/productsearch/datasheet/rchip/PYu-AC_51_RoHS_L_8.pdf, componentlink2description="DigiKey Link", componentlink2url=https://www.digikey.com/en/products/detail/yageo/AC0603FR-134K7L/14008318, Composition="Thick Film", Height - Seated (Max)="0.022\" (0.55mm)", lastupdated="25.07.2024 09:19:09", Lifecycle Status=Active, Minimum Order=1, Number of Terminations=2, Package / Case="0603 (1608 Metric)", packaging=CutTape, Part Number=AC0603FR-134K7L, Part Status=Active, partid=66748, price=0.01, Resistance="4.7 kOhms", series=AC, Size / Dimension="0.063\" L x 0.031\" W (1.60mm x 0.80mm)", Supplier 1=DigiKey
R3 R4 R5: library part AC0603FR-0722RL, "RES SMD 22 OHM 1% 1/10W 0603", Device Package="0603 (1608 Metric)", manufacturer=Yageo, Operating Temperature="-55°C ~ 155°C", Power (Watts)="0.1W, 1/10W", Ratings=AEC-Q200, Supplier Device Package=0603, Supplier Part Number 1=YAG3581CT-ND, Temperature Coefficient=±100ppm/°C, Tolerance=±1%, componentlink1description=Datasheet, componentlink1url=https://www.yageo.com/upload/media/product/productsearch/datasheet/rchip/PYu-AC_51_RoHS_L_7.pdf, componentlink2description="DigiKey Link", componentlink2url=https://www.digikey.com/en/products/detail/yageo/AC0603FR-0722RL/5895927, Composition="Thick Film", Features="Automotive AEC-Q200, Moisture Resistant", Height - Seated (Max)="0.022\" (0.55mm)", lastupdated="25.07.2024 09:19:25", Lifecycle Status=Active, Minimum Order=1, Number of Terminations=2, Package / Case="0603 (1608 Metric)", packaging=CutTape, Part Number=AC0603FR-0722RL, Part Status=Active, partid=16487, price=0.01, Resistance="22 Ohms", series=AC, Size / Dimension="0.063\" L x 0.031\" W (1.60mm x 0.80mm)", Supplier 1=DigiKey
S1: "SWITCH SLIDE SPDT 0.4VA 28V", Current Rating (Amps)="0.4VA (AC/DC)", manufacturer="NKK Switches", Operating Temperature="-30°C ~ 85°C", Supplier Part Number 1=360-2388-ND, Voltage Rating - AC="28 V", Actuator Length=5.10mm, Actuator Type=Standard, Circuit=SPDT, componentlink1description=Datasheet, componentlink1url=https://www.nkkswitches.com/pdf/MSnonilluminated.pdf, componentlink2description="DigiKey Link", componentlink2url=https://www.digikey.com/en/products/detail/nkk-switches/MS12ASG13/1052535, Contact Finish=Gold, Contact Material=Copper, Contact Timing="Non-Shorting (BBM)", Features="Epoxy Sealed Terminals", lastupdated="26.09.2022 03:18:31", Lifecycle Status=Active, Minimum Order=1, Mounting Type="Through Hole", packaging=Bulk, Part Number=MS12ASG13, Part Status=Active, partid=6, price=2.95, series=MS, Supplier 1=DigiKey, Switch Function=On-On, Termination Style="PC Pin", Voltage Rating - DC="28 V"
S2: "SWITCH TACTILE SPST-NO 0.05A 24V", Contact Rating @ Voltage="0.05A @ 24VDC", manufacturer="TE Connectivity ALCOSWITCH Switches", Operating Force=260gf, Supplier Part Number 1=1-1977223-9-ND, Actuator Height off PCB, Vertical=7.00mm, Actuator Orientation="Top Actuated", Actuator Type=Standard, Circuit=SPST-NO, componentlink1description=Datasheet, componentlink1url=https://www.te.com/commerce/DocumentDelivery/DDEController?Action=srchrtrv&DocNm=1308111-1_SWITCHES_CORE_PROGRAM_CATALOG&DocType=CS&DocLang=English, componentlink2description="DigiKey Link", componentlink2url=http://digikey.com/product-detail/en/te-connectivity-alcoswitch-switches/1-1977223-9/1-1977223-9-ND/5401299, lastupdated="3.06.2024 20:19:31", Lifecycle Status=Active, Minimum Order=1500, Mounting Type="Surface Mount", Outline="6.00mm x 6.00mm", packaging=Bulk, Part Number=1-1977223-9, price=0.36, series=FSMJSMA, Supplier 1=DigiKey, Switch Function=Off-Mom, Termination Style="Gull Wing", Illumination=Non-Illuminated
U1: "Accelerometer, Gyroscope, 6 Axis Sensor I2C Output", manufacturer="TDK InvenSense", Operating Temperature="-40°C ~ 85°C", Package / Case="24-VFQFN Module Exposed Pad", componentlink1description=Datasheet, componentlink1url=https://invensense.tdk.com/wp-content/uploads/2015/02/MPU-6000-Datasheet1.pdf, Output Type=I2C, Sensor Type="Accelerometer, Gyroscope, 6 Axis"
U2: "Pressure Sensor 4.35PSI ~ 15.95PSI (30kPa ~ 110kPa) Absolute 16b 8-SMD", manufacturer="Bosch Sensortec", Operating Pressure="4.35PSI ~ 15.95PSI (30kPa ~ 110kPa)", Operating Temperature="-40°C ~ 85°C", Package / Case=8-SMD, Voltage - Supply="1.71V ~ 3.6V", Accuracy="±0.015PSI (±0.1kPa)", componentlink1description=Datasheet, componentlink1url=https://www.bosch-sensortec.com/media/boschsensortec/downloads/datasheets/bst-bmp280-ds001.pdf, Features="Standby Mode", Maximum Pressure="290.08PSI (2000kPa)", Mounting Type="Surface Mount", Output=16b, Output Type="I2C, SPI", Port Style="No Port", Pressure Type=Absolute, Termination Style="SMD (SMT) Tab"
U3: "ARM® Cortex®-M4 STM32F4 Microcontroller IC 32-Bit Single-Core 100MHz 512KB (512K x 8) FLASH 64-LQFP (10x10)", manufacturer=ST, Operating Temperature="-40°C ~ 85°C (TA)", Package / Case=64-LQFP, Supplier Device Package="64-LQFP (10x10)", Voltage - Supply (Vcc/Vdd)="1.7V ~ 3.6V", componentlink1description=Datasheet, componentlink1url=https://www.st.com/content/ccc/resource/technical/document/datasheet/b3/a5/46/3b/b4/e5/4c/85/DM00115249.pdf/files/DM00115249.pdf/jcr:content/translations/en.DM00115249.pdf, componentlink2description="Digikey Link", componentlink2url=https://www.digikey.com/en/products/detail/stmicroelectronics/stm32f411ret6/4935722, Connectivity="I2C, IrDA, LINbus, MMC/SD/SDIO, SPI, UART/USART, USB OTG", Core Processor="ARM® Cortex®-M4", Core Size="32-Bit Single-Core", Data Converters="A/D 16x12b", Mounting Type="Surface Mount", Number of I/O=50, Oscillator Type=Internal, Peripherals="Brown-out Detect/Reset, DMA, I2S, POR, PWM, WDT", Program Memory Size="512KB (512K x 8)", Program Memory Type=FLASH, RAM Size="128K x 8", series=STM32F4, Speed=100MHz
Y1: library part ABM8G-16.000MHZ-18-D2Y-T3, "CRYSTAL 16.0000MHZ 18PF SMD", Device Package="4-SMD, No Lead", ESR (Equivalent Series Resistance)="80 Ohms", Frequency Stability=±30ppm, Frequency Tolerance=±20ppm, Load Capacitance=18pF, manufacturer="Abracon LLC", Operating Mode=Fundamental, Operating Temperature="-40°C ~ 85°C", Supplier Part Number 1=535-14314-1-ND, componentlink1description=Datasheet, componentlink1url=https://abracon.com/Resonators/ABM8G.pdf, componentlink2description="DigiKey Link", componentlink2url=http://digikey.com/product-detail/en/abracon-llc/ABM8G-16.000MHZ-18-D2Y-T3/535-14314-1-ND/8538154, Frequency=16MHz, Height - Seated (Max)="0.039\" (1.00mm)", lastupdated="19.03.2020 22:36:25", Lifecycle Status=Active, Minimum Order=1, Mounting Type="Surface Mount", Package / Case="4-SMD, No Lead", packaging=TapeAndReel, Part Number=ABM8G-16.000MHZ-18-D2Y-T3, Part Status=Active, partid=348, price=0.51, series=ABM8G, Size / Dimension="0.126\" L x 0.098\" W (3.20mm x 2.50mm)", Supplier 1=DigiKey, Type="MHz Crystal"

## Free pads (board coordinates)
  round 39.37 hole 299.21 mask+1.97: 6(275.59,230) 6(275.59,1653.54) 6(2362.2,230) 6(2362.2,1653.54)

## Via types
v1: diameter 19.68, hole 7.87, Top Layer to Bottom Layer, 13 vias
v2: diameter 23.62, hole 13.78, Top Layer to Bottom Layer, 12 vias

## Nets (pads, with @x,y where several pads share a name; then routed paths per layer and width w, separated by ;. In a path a pad name is that pad's centre, name@x,y a point inside that pad or via, vN(x,y) a via of type N, cw(c..) or ccw(c..) an arc to the next point about the centre after c; other vN are vias at no path point)
+3V3: C1.2 C2.2 C3.2 C5.2 C9.2 C10.2 C11.2 C12.2 C13.2 C14.2 C15.2 C16.2 C17.2 D6.2 IC1.5 J3.8 J4.1 J5.1 J6.1 R2.2 S1.3 U1.8 U1.13 U2.2 U2.6 U2.8 U3.1 U3.13 U3.19 U3.32 U3.48 U3.64 | length 7279.5
  Top Layer w10: C13.2 1078.43,673.43 1100.83,695.83 U3.13 1190.83,695.83 1223.15,728.15 ; C15.2 1111.57,966.85 U3.1 ; C12.2 1203.43,1066.57 1223.15,1046.85 U3.64 1223.15,728.15 ; 1223.15,932.05 U3.48 1638.9,932.05 1651.85,945 C14.2 ; C16.2 1306.57,488.43 1262.52,532.48 U3.19 1262.52,688.78 ; C11.2 1586.57,491.85 U3.32 1518.43,621.57 1451.22,688.78 1262.52,688.78 ; U2.2 1612.8,1237.2 ; U2.8 1658.11,1215 1635,1215 1612.8,1237.2 ; C10.2 1686.57,1271.57 1677.8,1262.8 U2.6 1638.39,1262.8 1612.8,1237.2 ; C3.2 2054.37,525.63 2065,515 2065,488.35 U1.13 ; U1.8 2093.03,380 2120,380 2148.15,351.85 C2.2 ; 1223.15,728.15 1262.52,688.78
  Top Layer w25: R2.2 1024.96,673.43 C13.2 ; IC1.5 989.17,1237.4 C5.2 ; C15.2 1115,1003.43 1115,1175 ; C12.2 1190.63,1107.8 C17.2 1115,1175 ; J5.1 1420,170 1465,215 J3.8 1565,275 1586.57,296.57 C11.2 ; C10.2 C9.2 1800,1310 ; C3.2 2036.57,577.8 C1.2 2268.08,635 2381.54,521.54 ; C2.2 2211.85,351.85 2381.54,521.54 ; C5.2 995,1410 949.92,1455.08 S1.3 949.92,1599.92 1095,1745 1540,1745 1650,1635 J6.1 1650,1460 1800,1310 ; C5.2 1058.43,1231.57 1115,1175 ; 1800,1310 2040,1310 2078.8,1271.2 D6.2 2115,1240 2175,1180 2255,1180 J4.1 2270,1175 2350,1175 2381.54,1143.46 2381.54,521.54
Button: C19.2 R2.1 S2.1 S2.2 U3.2 | length 1676.4
  Top Layer w10: v1(635,605) 685,605 C19.2 750,507.72 S2.1 820.98,471.54 R2.1 ; v1(970,1045) 970,1015 1072.64,912.36 U3.2
  Top Layer w25: S2.2 S2.1
  Bottom Layer w10: v1(635,605) 585,655 585,840 790,1045 v1(970,1045)
GND: C1.1 C2.1 C3.1 C4.1 C5.1 C6.1 C7.1 C8.1 C9.1 C10.1 C11.1 C12.1 C13.1 C14.1 C15.1 C16.1 C17.1 C18.2 C19.1 C20.2 D3.1 D4.1 D5.2 D6.1 D7.1 D8.1 D9.1 IC1.2 J1.2 J2.5 J2.S1 J2.S2 J2.S3 J2.S4 J3.1 J4.5 J5.4 J6.4 S1.1 S2.3 S2.4 U1.1 U1.9 U1.18 U2.1 U2.5 U2.7 U3.12 U3.18 U3.31 U3.47 U3.63 Y1.2 Y1.4 | length 1030.4
  Top Layer w10: J2.5 472.01,632.01 490,650 490,690 470,710 D5.2 ; C13.1 1071.06,715.51 U3.12 ; U3.18 1242.83,485.59 1255,473.43 v2(1255,410) ; U3.63 1242.83,1081.26 C12.1 ; U3.31 1498.74,509.68 C11.1 ; U3.47 1698.94,912.36 C14.1 ; U1.1 1965.79,309.08 1985,289.87 v2(1985,280) ; U1.9 2155.16,400.16 C2.1 ; C7.1 2236.57,531.57 v2(2240,535)
I2C1_SCL: U2.4 U3.58 | length 433.1
  Top Layer w10: U3.58 1341.26,1051.26 1341.26,1111.26 1518.39,1288.39 U2.4
I2C1_SDA: U2.3 U3.59 | length 559.1
  Top Layer w10: U3.59 1321.57,1126.57 1510,1315 1610,1315 1625,1300 1625,1280 1607.8,1262.8 U2.3
I2C3_SCL: U1.23 U3.41 | length 694.5
  Top Layer w10: U3.41 1595.94,795 1785,795 v1(1805,775) ; v2(1875,410) 1875,397.26 1891.79,380.47 U1.23
  Bottom Layer w10: v1(1805,775) 1875,705 v2(1875,410)
I2C3_SDA: U1.24 U3.40 | length 689.4
  Top Layer w10: U3.40 1750.43,774.57 v1(1795,730) ; v2(1840,400) 1840,385 1864.21,360.79 U1.24
  Bottom Layer w10: v1(1795,730) 1840,685 v2(1840,400)
MPU6050_INT: U1.12 U3.39 | length 740.4
  Top Layer w10: U3.39 1720.12,754.88 1790,685 v1(1900,685) ; U1.12 2109.21,459.21 2125,475 v2(2125,570)
  Bottom Layer w10: v1(1900,685) 2010,685 v2(2125,570)
NetC4_2: C4.2 D1.2 D2.2 IC1.1 IC1.3 | length 544.9
  Top Layer w15: D1.2 632.48,1052.48 690,1110 690,1176.26 D2.2 ; C4.2 715,1285 715,1240 693.74,1218.74 D2.2 ; IC1.3 814.25,1160 775,1160 755,1180 ; IC1.1 777.4,1237.4 755,1215 755,1180 ; D2.2 755,1180
NetC6_2: C6.2 IC1.4 | length 90.7
  Top Layer w10: C6.2 923.15,1116.57 IC1.4
NetC7_2: C7.2 U1.10 | length 111.7
  Top Layer w10: U1.10 2114.84,419.84 2173.43,478.43 C7.2
NetC8_2: C8.2 U1.20 | length 156.8
  Top Layer w10: C8.2 1905,450 1915,440 1936.97,440 U1.20
NetC20_1: C20.1 U3.30 | length 97.8
  Top Layer w10: C20.1 1450,480 1480,510 1480,559.06 U3.30
NetC21_1: C21.1 Y1.1 | length 96.1
  Top Layer w10: Y1.1 886.96,894.54 C21.1
NetC21_2: C21.2 U3.5 | length 185.7
  Top Layer w10: C21.2 1056.69,853.31 U3.5
NetC22_1: C22.1 Y1.3 | length 95
  Top Layer w10: Y1.3 928.75,725 C22.1
NetC22_2: C22.2 U3.6 | length 193.2
  Top Layer w10: C22.2 1053.62,833.62 U3.6
NetD7_2: D7.2 J4.3 R4.1 | length 279.5
  Top Layer w25: D7.2 2068.8,1001.48 R4.1 2240,1005 J4.3
NetD8_2: D8.2 J4.4 R5.1 | length 293
  Top Layer w25: D8.2 2068.8,811.2 2060,820 2060,849.72 R5.1 2135,850 2170,885 J4.4
NetD9_2: D9.2 J4.2 R3.1 | length 264.5
  Top Layer w25: R3.1 2070.61,1159.67 D9.2 J4.2
NetR1_1: R1.1 S1.2 | length 325.5
  Top Layer w25: S1.2 1134.96,1420.04 1196.54,1358.46 R1.1
NetR1_2: R1.2 U3.60 | length 277.1
  Top Layer w10: R1.2 1301.89,1231.57 1301.89,1076.89 1301.89,1038.11 U3.60
NRF24_CE: J3.2 U3.38 | length 1240
  Top Layer w10: U3.38 1704.8,735.2 1805,635 1805,330 1855,280 1910,280 1950,240 1950,100 1890,40 1705,40 1665,80 J3.2
NRF24_CSN: J3.7 U3.33 | length 470
  Top Layer w10: U3.33 1628.23,636.77 1645,620 1645,235 J3.7
NRF24_IRQ: J3.5 U3.37 | length 668
  Top Layer w10: U3.37 1689.49,715.51 1775.58,629.42 1775.58,566.23 1775.58,540.58 v2(1775,540)
  Bottom Layer w10: v2(1775,540) 1775,305 J3.5
SPI2_MISO: J3.4 U3.35 | length 1333.8
  Top Layer w10: U3.35 1653.86,676.14 1690,640 1690,575 v2(1695,575)
  Bottom Layer w10: v2(1695,575) 1575,575 1455,455 1455,85 1510,30 1825,30 1865,70 J3.4
SPI2_MOSI: J3.6 U3.36 | length 600.4
  Top Layer w10: U3.36 1674.17,695.83 1720,650 1720,590 1735,575 v2(1740,575)
  Bottom Layer w10: v2(1740,575) 1740,240 J3.6
SPI2_SCK: J3.3 U3.34 | length 1038.8
  Top Layer w10: U3.34 1638.54,656.46 1665,630 1665,540 v2(1680,525)
  Bottom Layer w10: v2(1680,525) 1490,335 1490,85 1525,50 1720,50 1765,95 J3.3
SWCLK: R4.2 U3.49 | length 572
  Top Layer w10: U3.49 1518.43,1048.43 1560,1090 1913.35,1090 R4.2
SWDIO: R3.2 U3.46 | length 905
  Top Layer w10: U3.46 1762.68,892.68 1790,920 v1(1785,920) ; v1(1950,1150) 1960,1160 R3.2
  Bottom Layer w10: v1(1785,920) 1775,920 1755,900 1755,855 1810,800 1925,800 1950,825 1950,1075 v1(1950,1150)
SWO: R5.2 U3.55 | length 817.2
  Top Layer w10: U3.55 1400.32,1100.32 v1(1405,1105) ; v1(1840,1025) 1850,1015 1860,1005 1860,983.35 1938.35,905 R5.2
  Bottom Layer w10: v1(1405,1105) 1420,1120 1745,1120 v1(1840,1025)
USART1_RX: J6.2 U3.43 | length 1040.8
  Top Layer w10: U3.43 1848.62,833.62 v1(1880,865)
  Bottom Layer w10: J6.2 1745,1545 1745,1380 1780,1345 1780,1215 1880,1115 v1(1880,865)
USART1_TX: J6.3 U3.42 | length 1063.4
  Top Layer w10: U3.42 1888.94,813.94 1910,835 v1(1910,840)
  Bottom Layer w10: J6.3 1850,1250 1910,1190 v1(1910,840)
USART_RX: J5.2 U3.17 | length 405.8
  Top Layer w10: J5.2 1215,345 1200,360 1200,490 1223.15,513.15 U3.17
USART_TX: J5.3 U3.16 | length 516.6
  Top Layer w10: J5.3 1095,190 1095,620 1111.77,636.77 U3.16
USB_D_N: D5.1 J2.2 | length 117.3
  Top Layer w15: J2.2 396.5,726.5 417.4,747.4 D5.1
USB_D_P: D5.3 J2.3 | length 117.9
  Top Layer w15: J2.3 395,695 415,675 443.78,675 D5.3
USB_DN: D5.6 U3.44 | length 1807.2
  Top Layer w10: D5.6 652.6,747.4 v2(655,745) ; U3.44 1813.31,853.31 v1(1850,890)
  Bottom Layer w10: v2(655,745) 1180,745 1475,1040 1780,1040 1850,970 1850,910 v1(1850,890)
USB_DP: D5.4 U3.45 | length 1731.5
  Top Layer w10: D5.4 652.6,672.6 v2(655,675) ; U3.45 1787.99,872.99 v1(1810,895)
  Bottom Layer w10: v2(655,675) 1140,675 1485,1020 1765,1020 1810,975 v1(1810,895)
VCC_BAT: D2.1 D3.2 J1.1
VCC_USB: C18.1 D1.1 D4.2 D5.5 J2.1 | length 535.7
  Top Layer w15: J2.1 382.99,757.99 405,780 405,801.93 423.07,820 D4.2 ; D1.1 463.43,1008.43 C18.1 446.2,887.78 D4.2 ; D5.5 515,710 495,730 495,785 460,820 D4.2
pads on no net: J2.4 J2.M1 J2.M2 S1.M U1.2 U1.3 U1.4 U1.5 U1.6 U1.7 U1.11 U1.14 U1.15 U1.16 U1.17 U1.19 U1.21 U1.22 U3.3 U3.4 U3.7 U3.8 U3.9 U3.10 U3.11 U3.14 U3.15 U3.20 U3.21 U3.22 U3.23 U3.24 U3.25 U3.26 U3.27 U3.28 U3.29 U3.50 U3.51 U3.52 U3.53 U3.54 U3.56 U3.57 U3.61 U3.62

## Polygon pours and split planes (outlines as drawn)
GND on Top Layer "GND_L01_P001" (solid, remove dead copper, pour order 1): 40,1835 2535,1835 2535,20 30,20 30,1825
VCC_BAT on Top Layer "VCC_BAT_L01_P000" (solid, pour order 0): 294,1194 404,1194 444,1194 480,1230 590,1230 610,1210 610,1130 580,1100 400,1100 355,1055 275,1055 250,1080 250,1150
GND on Bottom Layer "GND_L02_P002" (solid, pour order 2): 35,1830 40,1825 2550,1825 2550,55 2510,15 20,15 19.22,15.78

## Keep-outs
Keep-Out Layer:
  the board outline again, w10

## Silkscreen, mask and mechanical layers (free items; w line width, h text height)
Top Overlay:
  region: 5 vertices and 2 holes, not listed, extent 450.06,1463.12 705.91,1668.08